# Altium PCB DE-020224.PcbDoc (part 1 of 3)
Units mil, origin at the board's own origin, x right, y up, seen from the top; angles counter-clockwise.
Board outline 7874.02 x 3937.01 mil, 2 copper layers (Top Layer, Bottom Layer); 364 components, 290 nets, 895 pads, 45 vias.
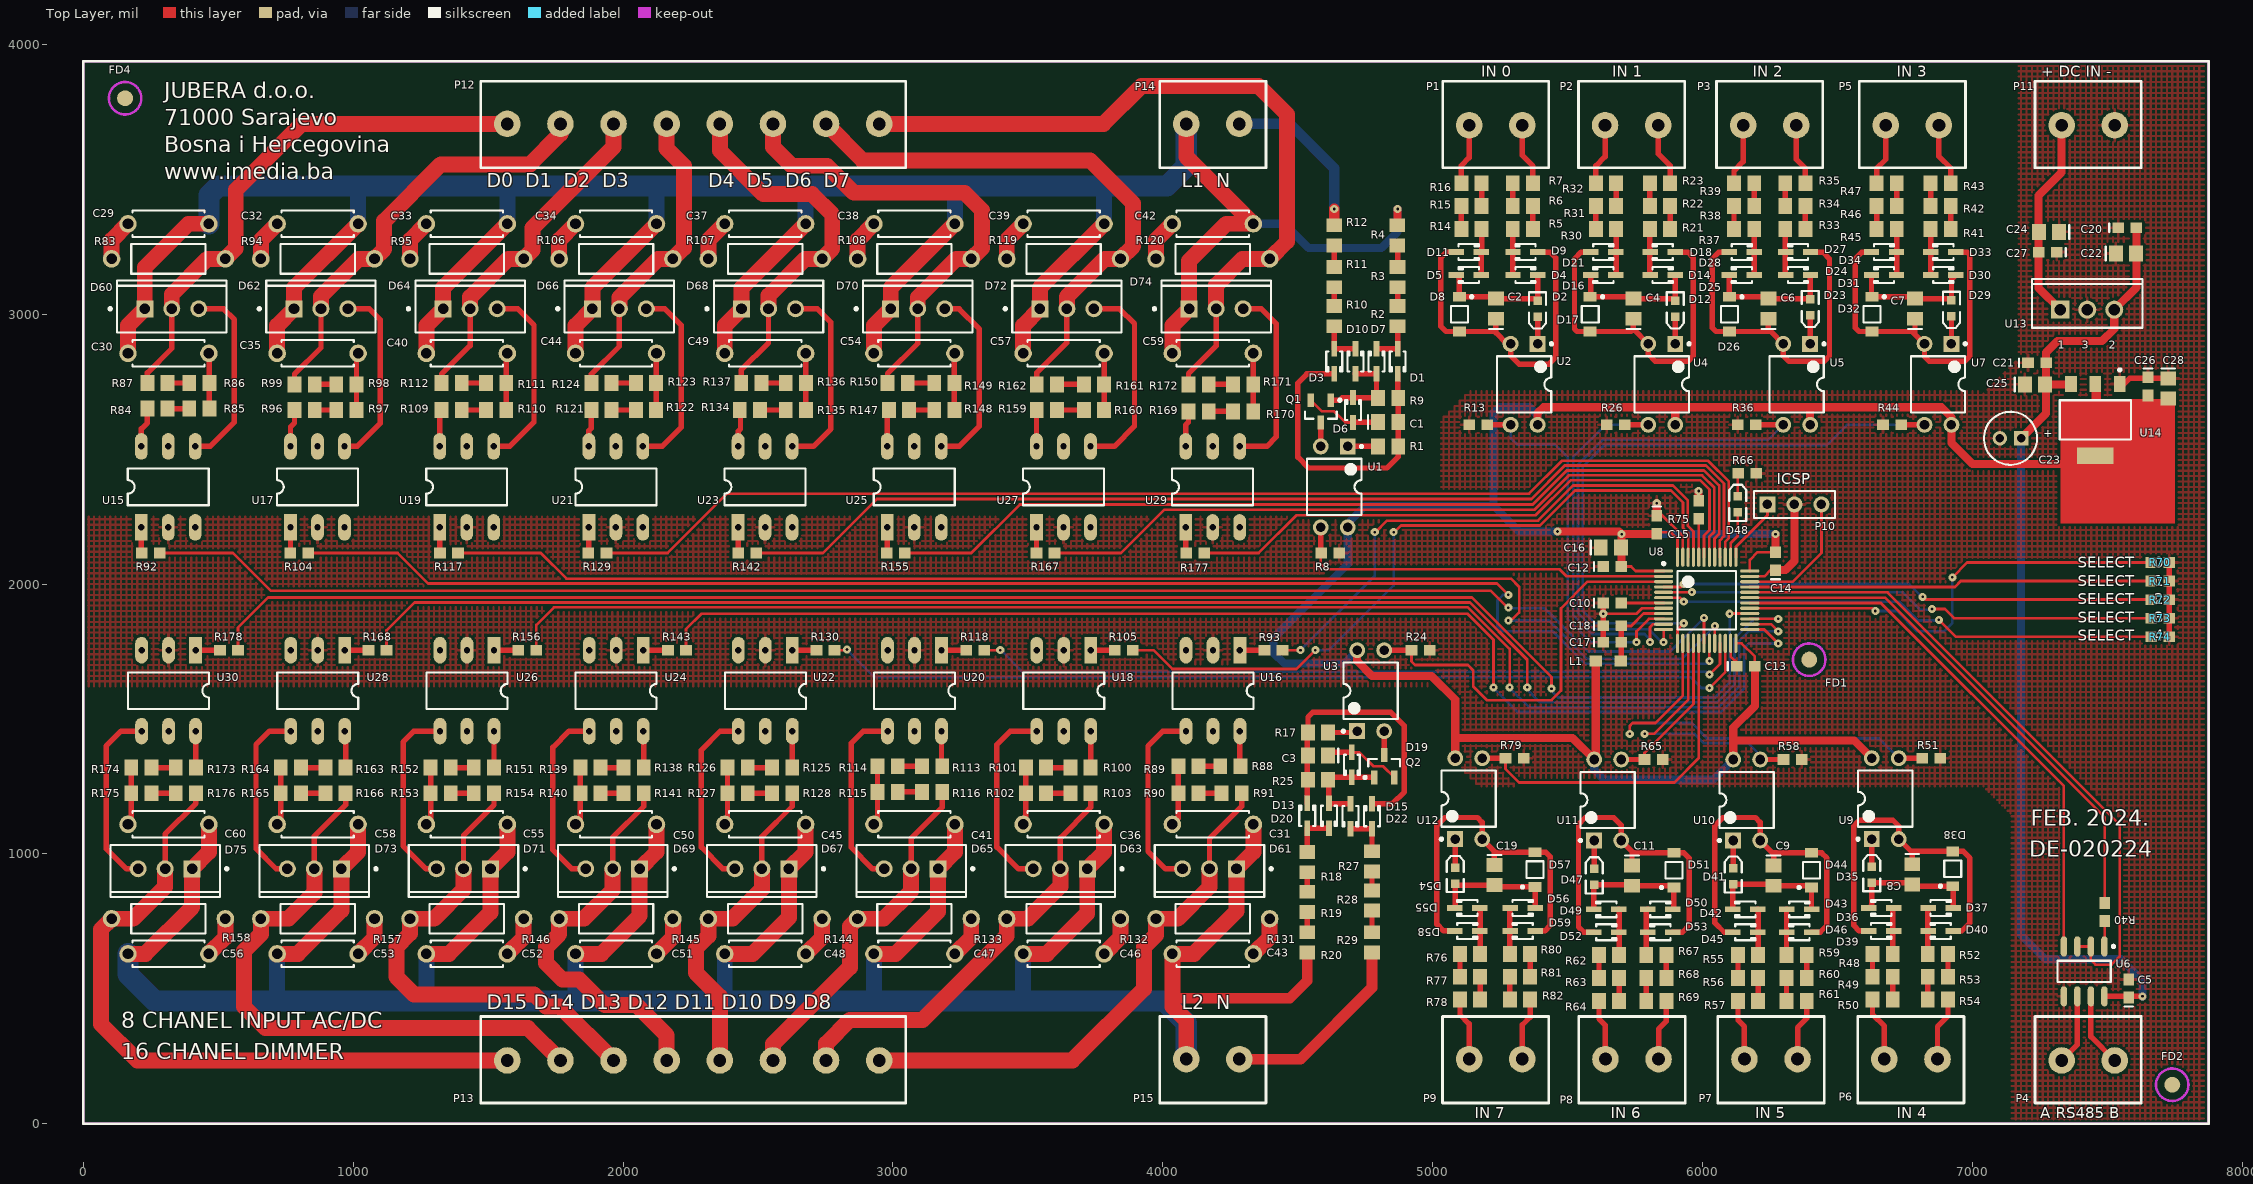
[diagram p0: Top Layer view]
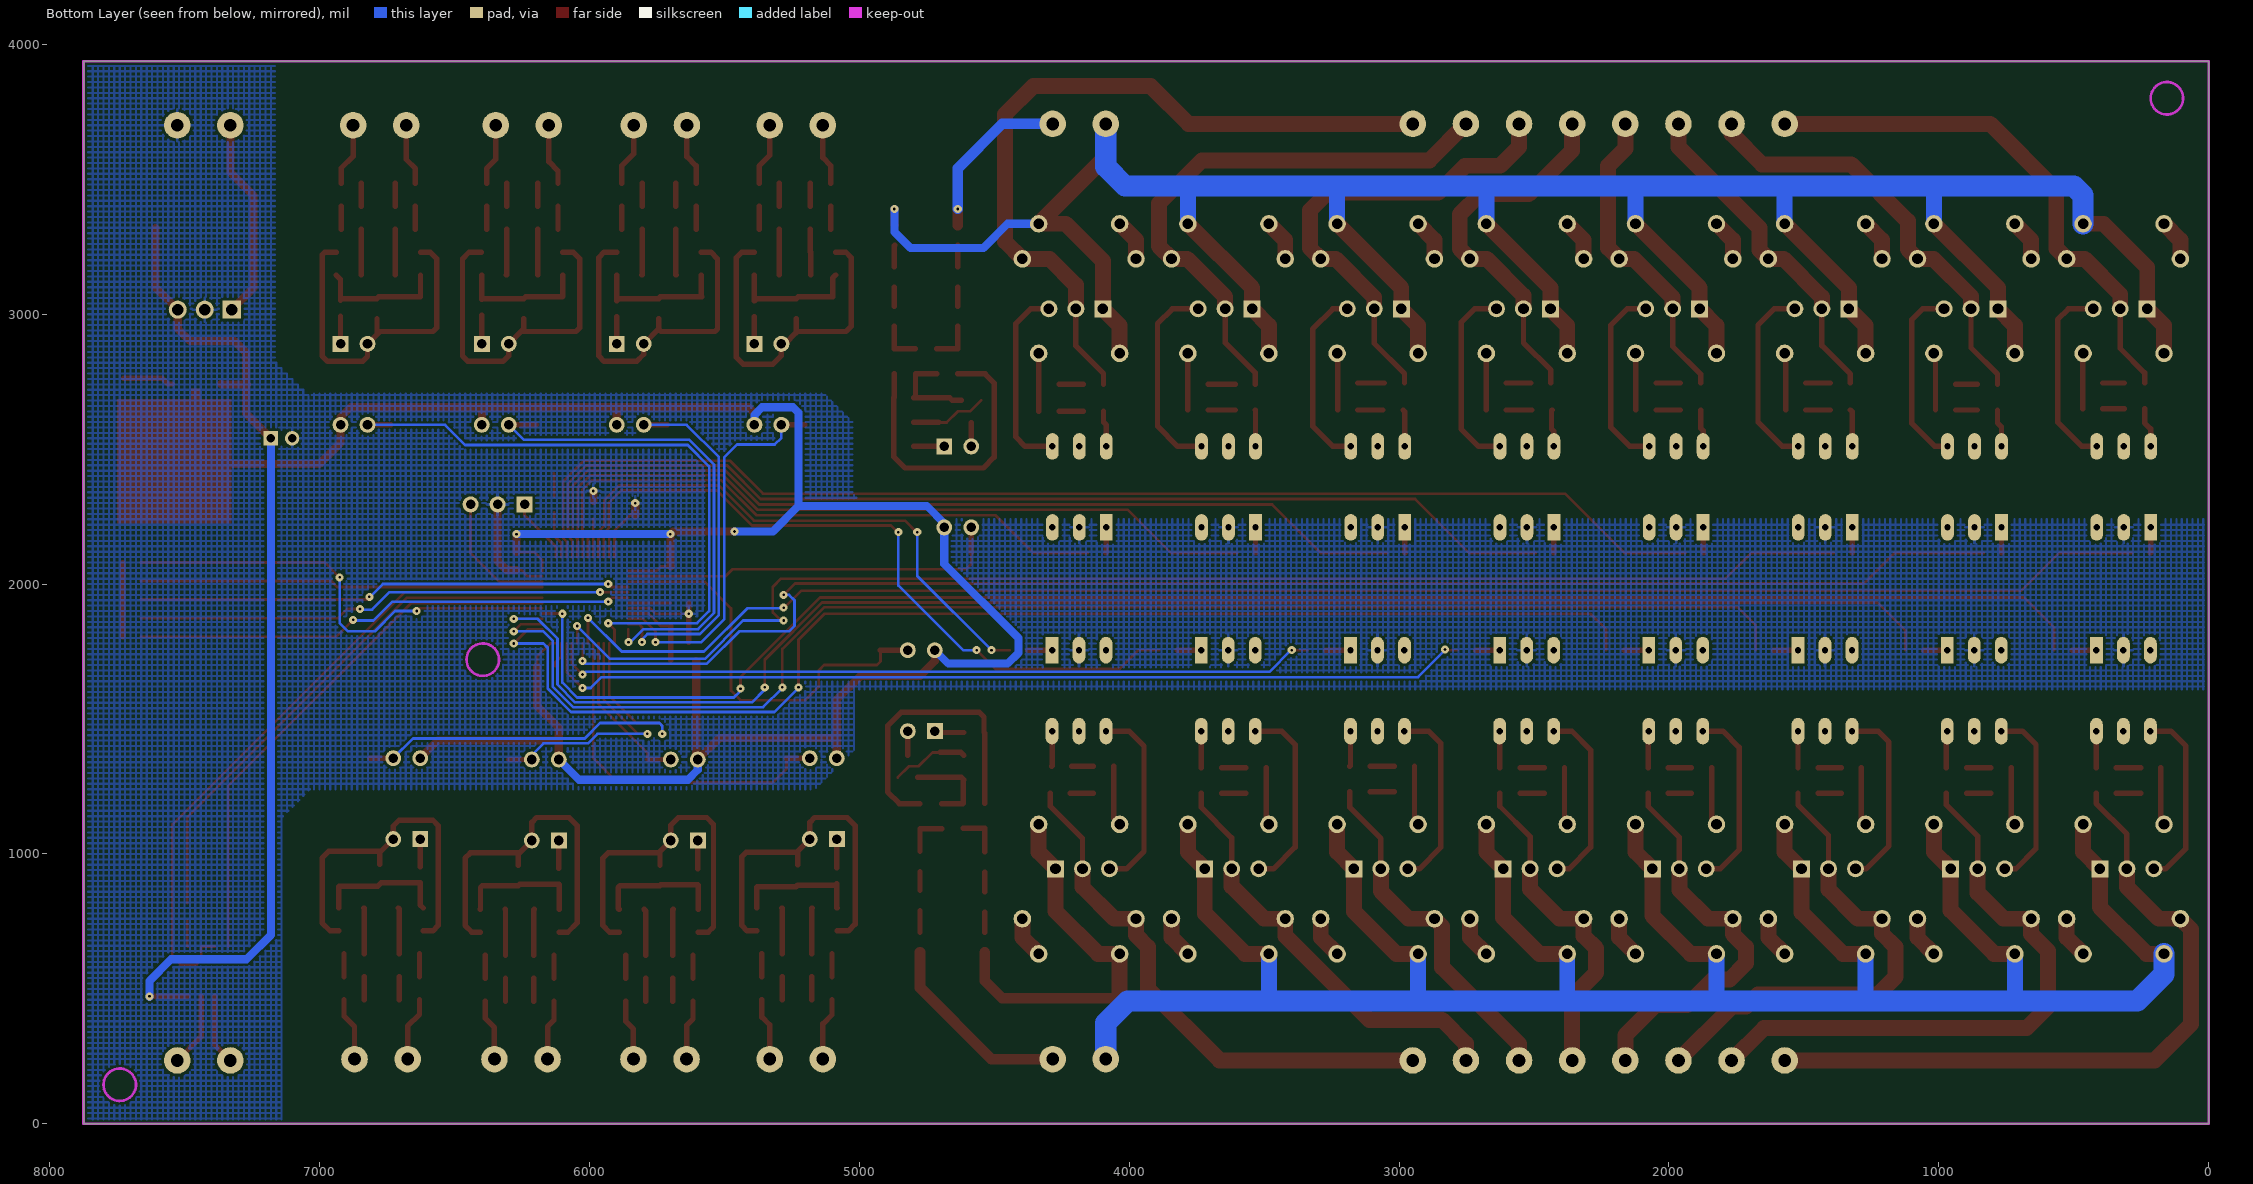
[diagram p1: Bottom Layer view, seen from below]

## Layer stack, top to bottom
Top Solder: solder mask 0.4, Solder Resist, Dk 3.5
Top Layer: signal copper 1.4
Dielectric 1: dielectric 12.6, FR-4, Dk 4.8
Bottom Layer: signal copper 1.4
Bottom Solder: solder mask 0.4, Solder Resist, Dk 3.5

## Board outline
0,0 0,3937.01 7874.02,3937.01 7874.02,0

## Design rules (kind name [scope] priority, off if disabled: settings)
Clearance [All] p1: gap=10 ignorepadtopadclearanceinfootprint=FALSE except(0: Arc-Hole Track-Hole SMDPad-Hole THPad-Hole Via-Hole Fill-Hole Poly-Hole Region-Hole Text-Hole; 5: SMDPad-SMDPad; 8: Arc-Arc Arc-Track Arc-SMDPad Arc-THPad Arc-Via Arc-Fill Arc-Poly Arc-Region Arc-Text Track-Track Track-SMDPad Track-THPad Track-Via Track-Fill Track-Poly Track-Region Track-Text)
MinimumSolderMaskSliver [All] p1 off: minsoldermaskwidth=10
PolygonConnect [All] p1: connectstyle=Relief reliefconductorwidth=10 reliefentries=4 polygonreliefangle="90 Angle" airgapwidth=10
RoutingVias [All] p1: holewidth=28 width=50 viastyle="Through Hole" minholewidth=10 minwidth=30 maxholewidth=28 maxwidth=50
SilkToSilkClearance [All] p1 off: silktosilkclearance=10
SilkToSolderMaskClearance [IsPad] p1 off: minsilkscreentomaskgap=10 clearancetoexposedcopper=TRUE
SolderMaskExpansion [All] p1: expansion=4
Width [All] p1: maxlimit=118.11 minlimit=10 preferedwidth=20
27 further rules are at their usual default settings.

## Classes and differential pairs
component class DE-020224_02: C29 C30 C31 C32 C33 C34 C35 C36 C37 C38 C39 C40 C41 C42 C43 C44 C45 C46 C47 C48 C49 C50 C51 C52 C53 C54 C55 C56 C57 C58 C59 C60 D60 D61 D62 D63 D64 D65 D66 D67 D68 D69 D70 D71 D72 D73 D74 D75 FD4 P12 P13 P14 P15 R83 R84 R85 R86 R87 R88 R89 R90 R91 R92 R93 R94 R95 R96 R97 R98 R99 R100 R101 R102 R103 R104 R105 R106 R107 R108 R109 R110 R111 R112 R113 R114 R115 R116 R117 R118 R119 R120 R121 R122 R123 R124 R125 R126 R127 R128 R129 R130 R131 R132 R133 R134 R135 R136 R137 R138 R139 R140 R141 R142 R143 R144 R145 R146 R147 R148 R149 R150 R151 R152 R153 R154 R155 R156 R157 R158 R159 R160 R161 R162 R163 R164 R165 R166 R167 R168 R169 R170 R171 R172 R173 R174 R175 R176 R177 R178 U15 U16 U17 U18 U19 U20 U21 U22 U23 U24 U25 U26 U27 U28 U29 U30
component class DE-020224_01: C1 C2 C3 C4 C5 C6 C7 C8 C9 C10 C11 C12 C13 C14 C15 C16 C17 C18 C19 C20 C21 C22 C23 C24 C25 C26 C27 C28 D1 D2 D3 D4 D5 D6 D7 D8 D9 D10 D11 D12 D13 D14 D15 D16 D17 D18 D19 D20 D21 D22 D23 D24 D25 D26 D27 D28 D29 D30 D31 D32 D33 D34 D35 D36 D37 D38 D39 D40 D41 D42 D43 D44 D45 D46 D47 D48 D49 D50 D51 D52 D53 D54 D55 D56 D57 D58 D59 FD1 FD2 L1 P1 P2 P3 P4 P5 P6 P7 P8 P9 P10 P11 Q1 Q2 R1 R2 R3 R4 R5 R6 R7 R8 R9 R10 R11 R12 R13 R14 R15 R16 R17 R18 R19 R20 R21 R22 R23 R24 R25 R26 R27 R28 R29 R30 R31 R32 R33 R34 R35 R36 R37 R38 R39 R40 R41 R42 R43 R44 R45 R46 R47 R48 R49 R50 R51 R52 R53 R54 R55 R56 R57 R58 R59 R60 R61 R62 R63 R64 R65 R66 R67 R68 R69 R70 R71 R72 R73 R74 R75 R76 R77 R78 R79 R80 R81 R82 U1 U2 U3 U4 U5 U6 U7 U8 U9 U10 U11 U12 U13 U14

## Components (designator, comment, footprint, x,y, rotation, side; value= is the part's Value field where it differs from the comment)
C1 "10uF" 0805 4835,2600 r0 top
C2 "10uF" 0805 5233.53,3020.21 r90 top
C3 "10uF" 0805 4575,1365 r180 top
C4 "10uF" 0805 5743.43,3020.21 r90 top
C5 "100nF" 0603 7578.43,501.54 r90 top
C6 "10uF" 0805 6243.43,3020.21 r90 top
C7 "10uF" 0805 6786.85,3020.21 r90 top
C8 "10uF" 0805 6776.57,924.79 r270 top
C9 "10uF" 0805 6263.15,919.79 r270 top
C10 "100nF" 0603 5665,1930 r0 top
C11 "10uF" 0805 5738.15,919.79 r270 top
C12 "100nF" 0603 5665,2065 r0 top
C13 "100nF" 0603 6160,1695 r0 top
C14 "100nF" 0603 6270,2085 r90 top
C15 "100nF" 0603 5830,2220 r270 top
C16 "4u7" 0805 5660,2135 r0 top value=10uF
C17 "1uF" 0603 5665,1785 r0 top
C18 "100nF" 0603 5665,1845 r0 top
C19 "10uF" 0805 5228.15,922.03 r270 top
C20 "100nF" 0603 7573.43,3320 r0 top
C21 "100nF" 0603 7239.19,2820 r0 top
C22 "10uF" 0805 7568.43,3225 r0 top
C23 "22uF" CAPPR2-5X11 7140.63,2540 r180 top value=47uF
C24 "10uF" 0805 7283.43,3305 r180 top
C25 "10uF" 0805 7231.31,2740 r0 top
C26 "100nF" 0603 7650,2732.44 r270 top
C27 "100nF" 0603 7278.43,3230 r180 top
C28 "10uF" 0805 7725,2724.57 r270 top
C29 "10nF/X2" VP52-2.5 315.53,3335 r0 top value=10nF
C30 "47nF/X2" VP52-2.5 315.53,2855 r0 top value=10nF
C31 "47nF/X2" VP52-2.5 4185,1110 r180 top value=10nF
C32 "10nF/X2" VP52-2.5 868.31,3335 r0 top value=10nF
C33 "10nF/X2" VP52-2.5 1421.09,3335 r0 top value=10nF
C34 "10nF/X2" VP52-2.5 1973.88,3335 r0 top value=10nF
C35 "47nF/X2" VP52-2.5 868.31,2855 r0 top value=10nF
C36 "47nF/X2" VP52-2.5 3632.22,1110 r180 top value=10nF
C37 "10nF/X2" VP52-2.5 2526.66,3335 r0 top value=10nF
C38 "10nF/X2" VP52-2.5 3079.44,3335 r0 top value=10nF
C39 "10nF/X2" VP52-2.5 3632.22,3335 r0 top value=10nF
C40 "47nF/X2" VP52-2.5 1421.09,2855 r0 top value=10nF
C41 "47nF/X2" VP52-2.5 3079.44,1110 r180 top value=10nF
C42 "10nF/X2" VP52-2.5 4185,3335 r0 top value=10nF
C43 "10nF/X2" VP52-2.5 4185,630 r180 top value=10nF
C44 "47nF/X2" VP52-2.5 1973.88,2855 r0 top value=10nF
C45 "47nF/X2" VP52-2.5 2526.66,1110 r180 top value=10nF
C46 "10nF/X2" VP52-2.5 3632.22,630 r180 top value=10nF
C47 "10nF/X2" VP52-2.5 3079.44,630 r180 top value=10nF
C48 "10nF/X2" VP52-2.5 2526.66,630 r180 top value=10nF
C49 "47nF/X2" VP52-2.5 2526.66,2855 r0 top value=10nF
C50 "47nF/X2" VP52-2.5 1973.88,1110 r180 top value=10nF
C51 "10nF/X2" VP52-2.5 1973.88,630 r180 top value=10nF
C52 "10nF/X2" VP52-2.5 1421.09,630 r180 top value=10nF
C53 "10nF/X2" VP52-2.5 868.31,630 r180 top value=10nF
C54 "47nF/X2" VP52-2.5 3079.44,2855 r0 top value=10nF
C55 "47nF/X2" VP52-2.5 1421.09,1110 r180 top value=10nF
C56 "10nF/X2" VP52-2.5 315.53,630 r180 top value=10nF
C57 "47nF/X2" VP52-2.5 3632.22,2855 r0 top value=10nF
C58 "47nF/X2" VP52-2.5 868.31,1110 r180 top value=10nF
C59 "47nF/X2" VP52-2.5 4185,2855 r0 top value=10nF
C60 "47nF/X2" VP52-2.5 315.53,1110 r180 top value=10nF
D1 "1N4148" SOD323 4870,2825 r270 top
D2 "LED_RED" 1.6X0.8X0.8 5388.43,3020 r270 top
D3 "1N4148" SOD323 4635,2825 r270 top
D4 "NF" SOD323 5343.43,3145 r0 top
D5 "NF" SOD323 5133.43,3145 r180 top
D6 "NF" SOD323 4705,2645 r90 top
D7 "1N4148" SOD323 4791.67,2825 r90 top
D8 "5V1" ONSC-SOD-123-2-425-04_V 5098.43,3000 r270 top
D9 "NF" SOD323 5343.43,3229.98 r180 top
D10 "1N4148" SOD323 4713.33,2825 r90 top
D11 "NF" SOD323 5133.43,3229.98 r0 top
D12 "LED_RED" 1.6X0.8X0.8 5898.43,3020 r270 top
D13 "1N4148" SOD323 4535,1141.26 r90 top
D14 "NF" SOD323 5851.85,3145 r0 top
D15 "1N4148" SOD323 4775,1140 r90 top
D16 "NF" SOD323 5631.85,3145 r180 top
D17 "5V1" ONSC-SOD-123-2-425-04_V 5583.43,3000 r270 top
D18 "NF" SOD323 5851.85,3229.98 r180 top
D19 "NF" SOD323 4700,1330 r270 top
D20 "1N4148" SOD323 4615,1141.26 r270 top
D21 "NF" SOD323 5631.85,3230 r0 top
D22 "1N4148" SOD323 4695,1140 r270 top
D23 "LED_RED" 1.6X0.8X0.8 6398.43,3025 r270 top
D24 "NF" SOD323 6353.43,3145 r0 top
D25 "NF" SOD323 6145,3145 r180 top
D26 "5V1" ONSC-SOD-123-2-425-04_V 6100,3000 r270 top
D27 "NF" SOD323 6353.43,3230 r180 top
D28 "NF" SOD323 6145,3230 r0 top
D29 "LED_RED" 1.6X0.8X0.8 6921.85,3022.24 r270 top
D30 "NF" SOD323 6891.85,3145 r0 top
D31 "NF" SOD323 6671.85,3145 r180 top
D32 "5V1" ONSC-SOD-123-2-425-04_V 6626.85,3000 r270 top
D33 "NF" SOD323 6891.85,3230 r180 top
D34 "NF" SOD323 6671.85,3230 r0 top
D35 "LED_RED" 1.6X0.8X0.8 6626.57,922.76 r90 top
D36 "NF" SOD323 6661.57,800 r180 top
D37 "NF" SOD323 6881.57,800 r0 top
D38 "5V1" ONSC-SOD-123-2-425-04_V 6926.57,945 r90 top
D39 "NF" SOD323 6661.57,715 r0 top
D40 "NF" SOD323 6881.57,715 r180 top
D41 "LED_RED" 1.6X0.8X0.8 6113.15,917.76 r90 top
D42 "NF" SOD323 6158.15,795 r180 top
D43 "NF" SOD323 6358.15,795 r0 top
D44 "5V1" ONSC-SOD-123-2-425-04_V 6403.15,940 r90 top
D45 "NF" SOD323 6158.15,710 r0 top
D46 "NF" SOD323 6358.15,710 r180 top
D47 "LED_RED" 1.6X0.8X0.8 5598.15,915 r90 top
D48 "LED_RED" 1.6X0.8X0.8 6130,2295 r90 top
D49 "NF" SOD323 5643.15,795 r180 top
D50 "NF" SOD323 5843.15,795 r0 top
D51 "5V1" ONSC-SOD-123-2-425-04_V 5893.15,940 r90 top
D52 "NF" SOD323 5643.15,710 r0 top
D53 "NF" SOD323 5843.15,710 r180 top
D54 "LED_RED" 1.6X0.8X0.8 5083.15,920 r90 top
D55 "NF" SOD323 5128.15,800 r180 top
D56 "NF" SOD323 5333.15,800 r0 top
D57 "5V1" ONSC-SOD-123-2-425-04_V 5378.15,942.24 r90 top
D58 "NF" SOD323 5128.15,715 r0 top
D59 "NF" SOD323 5333.15,715 r180 top
D60 "BTA16-600" ONSC-TO-220-3-221A-07 327.83,3020 r90 top
D61 "BTA16-600" ONSC-TO-220-3-221A-07 4172.7,945 r270 top
D62 "BTA16-600" ONSC-TO-220-3-221A-07 880.62,3020 r90 top
D63 "BTA16-600" ONSC-TO-220-3-221A-07 3619.92,945 r270 top
D64 "BTA16-600" ONSC-TO-220-3-221A-07 1433.4,3020 r90 top
D65 "BTA16-600" ONSC-TO-220-3-221A-07 3067.13,945 r270 top
D66 "BTA16-600" ONSC-TO-220-3-221A-07 1986.18,3020 r90 top
D67 "BTA16-600" ONSC-TO-220-3-221A-07 2514.35,945 r270 top
D68 "BTA16-600" ONSC-TO-220-3-221A-07 2538.96,3020 r90 top
D69 "BTA16-600" ONSC-TO-220-3-221A-07 1961.57,945 r270 top
D70 "BTA16-600" ONSC-TO-220-3-221A-07 3091.74,3020 r90 top
D71 "BTA16-600" ONSC-TO-220-3-221A-07 1408.79,945 r270 top
D72 "BTA16-600" ONSC-TO-220-3-221A-07 3644.52,3020 r90 top
D73 "BTA16-600" ONSC-TO-220-3-221A-07 856.01,945 r270 top
D74 "BTA16-600" ONSC-TO-220-3-221A-07 4197.3,3020 r90 top
D75 "BTA16-600" ONSC-TO-220-3-221A-07 303.23,945 r270 top
FD1 "Fiducial" Fiducial 6395,1720 r0 top
FD2 "Fiducial" Fiducial 7740,145 r0 top
FD4 "Fiducial" Fiducial 155,3800 r0 top
L1 "120R" SMD-0805 5650,1715 r0 top
P1 "TERMINAL BLOK 2" "TERMINAL BLOK 2" 5233.43,3700 r90 top
P2 "TERMINAL BLOK 2" "TERMINAL BLOK 2" 5736.85,3700 r90 top
P3 "TERMINAL BLOK 2" "TERMINAL BLOK 2" 6248.43,3700 r90 top
P4 "TERMINAL BLOK 2" "TERMINAL BLOK 2" 7428.43,235 r90 top
P5 "TERMINAL BLOK 2" "TERMINAL BLOK 2" 6776.85,3700 r90 top
P6 "TERMINAL BLOK 2" "TERMINAL BLOK 2" 6771.57,240 r270 top
P7 "TERMINAL BLOK 2" "TERMINAL BLOK 2" 6253.15,240 r270 top
P8 "TERMINAL BLOK 2" "TERMINAL BLOK 2" 5738.15,240 r270 top
P9 "TERMINAL BLOK 2" "TERMINAL BLOK 2" 5233.15,240 r270 top
P10 "Header 3" HDR1X3 6240,2295 r0 top
P11 "TERMINAL BLOK 2" "TERMINAL BLOK 2" 7428.43,3700 r90 top
P12 "DIMMER 0 ~ 7" "TERMINAL BLOK 8" 2260,3705 r270 top
P13 "DIMMER 8 ~ 15" "TERMINAL BLOK 8" 2260,235 r90 top
P14 "TERMINAL BLOK 2" "TERMINAL BLOK 2" 4185,3705 r270 top
P15 "TERMINAL BLOK 2" "TERMINAL BLOK 2" 4185,240 r270 top
Q1 "MMBT2222" SOT23_N 4585,2640 r270 top
Q2 "MMBT2222" SOT23_N 4820,1325 r90 top
R1 "1K" ERA-0805 4835,2510 r0 top
R2 "56K" ERA-0805 4870,2992.4 r270 top
R3 "56K" ERA-0805 4870,3137.4 r270 top
R4 "56K" ERA-0805 4868.46,3292.4 r270 top
R5 "47K" ERA-0805 5333.43,3315.03 r180 top
R6 "47K" ERA-0805 5333.43,3400.02 r0 top
R7 "47K" ERA-0805 5333.43,3485 r180 top
R8 "10K" ERA-0603 4620,2115 r0 top
R9 "10K" ERA-0805 4835,2690 r180 top
R10 "56K" ERA-0805 4635,2992.4 r270 top
R11 "56K" ERA-0805 4635,3137.4 r270 top
R12 "56K" ERA-0805 4635,3292.4 r270 top
R13 "10K" ERA-0603 5168.43,2590 r180 top
R14 "47K" ERA-0805 5143.43,3315.03 r0 top
R15 "47K" ERA-0805 5143.43,3400.02 r180 top
R16 "47K" ERA-0805 5143.43,3485 r0 top
R17 "1K" ERA-0805 4575,1450 r180 top
R18 "56K" ERA-0805 4535,970 r90 top
R19 "56K" ERA-0805 4535,822.4 r90 top
R20 "56K" ERA-0805 4535,672.4 r90 top
R21 "47K" ERA-0805 5841.85,3315.03 r180 top
R22 "47K" ERA-0805 5841.85,3400.02 r0 top
R23 "47K" ERA-0805 5841.85,3485 r180 top
R24 "10K" ERA-0603 4955,1755 r0 top
R25 "10K" ERA-0805 4575,1275 r0 top
R26 "10K" ERA-0603 5678.43,2590 r180 top
R27 "56K" ERA-0805 4775,972.6 r90 top
R28 "56K" ERA-0805 4775,827.6 r90 top
R29 "56K" ERA-0805 4775,672.6 r90 top
R30 "47K" ERA-0805 5641.85,3315 r0 top
R31 "47K" ERA-0805 5641.85,3400 r180 top
R32 "47K" ERA-0805 5641.85,3485 r0 top
R33 "47K" ERA-0805 6343.43,3315.03 r180 top
R34 "47K" ERA-0805 6343.43,3400.02 r0 top
R35 "47K" ERA-0805 6343.43,3485 r180 top
R36 "10K" ERA-0603 6163.43,2590 r180 top
R37 "47K" ERA-0805 6153.43,3315.03 r0 top
R38 "47K" ERA-0805 6153.43,3400.02 r180 top
R39 "47K" ERA-0805 6153.43,3485 r0 top
R40 "1K" ERA-0603 7490,785 r90 top
R41 "47K" ERA-0805 6881.85,3315.03 r180 top
R42 "47K" ERA-0805 6881.85,3400.02 r0 top
R43 "47K" ERA-0805 6881.85,3485 r180 top
R44 "10K" ERA-0603 6701.85,2590 r180 top
R45 "47K" ERA-0805 6681.85,3315.03 r0 top
R46 "47K" ERA-0805 6681.85,3400.02 r180 top
R47 "47K" ERA-0805 6681.85,3485 r0 top
R48 "47K" ERA-0805 6666.57,629.97 r0 top
R49 "47K" ERA-0805 6666.57,544.98 r180 top
R50 "47K" ERA-0805 6666.57,460 r0 top
R51 "10K" ERA-0603 6846.57,1355 r0 top
R52 "47K" ERA-0805 6871.57,629.97 r180 top
R53 "47K" ERA-0805 6871.57,544.98 r0 top
R54 "47K" ERA-0805 6871.57,460 r180 top
R55 "47K" ERA-0805 6168.15,624.97 r0 top
R56 "47K" ERA-0805 6168.15,539.98 r180 top
R57 "47K" ERA-0805 6168.15,455 r0 top
R58 "10K" ERA-0603 6333.15,1350 r0 top
R59 "47K" ERA-0805 6348.15,624.97 r180 top
R60 "47K" ERA-0805 6348.15,539.98 r0 top
R61 "47K" ERA-0805 6348.15,455 r180 top
R62 "47K" ERA-0805 5653.15,624.97 r0 top
R63 "47K" ERA-0805 5653.15,539.98 r180 top
R64 "47K" ERA-0805 5653.15,455 r0 top
R65 "10K" ERA-0603 5818.15,1350 r0 top
R66 "4K7" ERA-0603 6165,2410 r0 top
R67 "47K" ERA-0805 5828.15,624.97 r180 top
R68 "47K" ERA-0805 5828.15,539.98 r0 top
R69 "47K" ERA-0805 5828.15,455 r180 top
R70 "NF" ERA-0603 7695,2080 r0 top
R71 "NF" ERA-0603 7695,2011.25 r0 top
R72 "NF" ERA-0603 7695,1942.5 r0 top
R73 "NF" ERA-0603 7695,1873.75 r0 top
R74 "NF" ERA-0603 7695,1805 r0 top
R75 "10K" ERA-0603 5985,2275 r90 top
R76 "47K" ERA-0805 5138.15,630 r0 top
R77 "47K" ERA-0805 5138.15,545 r180 top
R78 "47K" ERA-0805 5138.15,460 r0 top
R79 "10K" ERA-0603 5303.15,1355 r0 top
R80 "47K" ERA-0805 5323.15,630 r180 top
R81 "47K" ERA-0805 5323.15,545 r0 top
R82 "47K" ERA-0805 5323.15,460 r180 top
R83 "100R" R6.35x2.3 315.53,3205 r180 top
R84 "220R" ERA-0805 275,2650 r0 top
R85 "220R" ERA-0805 430,2650 r0 top
R86 "220R" ERA-0805 430,2745 r180 top
R87 "220R" ERA-0805 275,2745 r180 top
R88 "220R" ERA-0805 4250,1325 r180 top
R89 "220R" ERA-0805 4095,1325 r180 top
R90 "220R" ERA-0805 4095,1225 r0 top
R91 "220R" ERA-0805 4255,1225 r0 top
R92 "330R" ERA-0603 250,2115 r180 top
R93 "330R" ERA-0603 4410,1755 r180 top
R94 "100R" R6.35x2.3 868.31,3205 r180 top
R95 "100R" R6.35x2.3 1421.09,3205 r180 top
R96 "220R" ERA-0805 820,2645 r0 top
R97 "220R" ERA-0805 975,2645 r0 top
R98 "220R" ERA-0805 975,2740 r180 top
R99 "220R" ERA-0805 820,2740 r180 top
R100 "220R" ERA-0805 3695,1320 r180 top
R101 "220R" ERA-0805 3530,1320 r180 top
R102 "220R" ERA-0805 3530,1225 r0 top
R103 "220R" ERA-0805 3695,1225 r0 top
R104 "330R" ERA-0603 800,2115 r180 top
R105 "330R" ERA-0603 3855,1755 r180 top
R106 "100R" R6.35x2.3 1973.88,3205 r180 top
R107 "100R" R6.35x2.3 2526.66,3205 r180 top
R108 "100R" R6.35x2.3 3079.44,3205 r180 top
R109 "220R" ERA-0805 1365,2645 r0 top
R110 "220R" ERA-0805 1530,2645 r0 top
R111 "220R" ERA-0805 1530,2745 r180 top
R112 "220R" ERA-0805 1365,2745 r180 top
R113 "220R" ERA-0805 3145,1325 r180 top
R114 "220R" ERA-0805 2980,1325 r180 top
R115 "220R" ERA-0805 2980,1230 r0 top
R116 "220R" ERA-0805 3145,1230 r0 top
R117 "330R" ERA-0603 1355,2115 r180 top
R118 "330R" ERA-0603 3305,1755 r180 top
R119 "100R" R6.35x2.3 3632.22,3205 r180 top
R120 "100R" R6.35x2.3 4185,3205 r180 top
R121 "220R" ERA-0805 1920,2645 r0 top
R122 "220R" ERA-0805 2085,2645 r0 top
R123 "220R" ERA-0805 2085,2745 r180 top
R124 "220R" ERA-0805 1920,2745 r180 top
R125 "220R" ERA-0805 2589.37,1320 r180 top
R126 "220R" ERA-0805 2424.37,1320 r180 top
R127 "220R" ERA-0805 2424.37,1225 r0 top
R128 "220R" ERA-0805 2589.37,1225 r0 top
R129 "330R" ERA-0603 1905,2115 r180 top
R130 "330R" ERA-0603 2750,1755 r180 top
R131 "100R" R6.35x2.3 4185,760 r0 top
R132 "100R" R6.35x2.3 3632.22,760 r0 top
R133 "100R" R6.35x2.3 3079.44,760 r0 top
R134 "220R" ERA-0805 2470,2645 r0 top
R135 "220R" ERA-0805 2640,2645 r0 top
R136 "220R" ERA-0805 2640,2745 r180 top
R137 "220R" ERA-0805 2475,2745 r180 top
R138 "220R" ERA-0805 2039.37,1320 r180 top
R139 "220R" ERA-0805 1879.37,1320 r180 top
R140 "220R" ERA-0805 1879.37,1225 r0 top
R141 "220R" ERA-0805 2039.37,1225 r0 top
R142 "330R" ERA-0603 2460,2115 r180 top
R143 "330R" ERA-0603 2200,1755 r180 top
R144 "100R" R6.35x2.3 2526.66,760 r0 top
R145 "100R" R6.35x2.3 1973.88,760 r0 top
R146 "100R" R6.35x2.3 1421.09,760 r0 top
R147 "220R" ERA-0805 3022.3,2645 r0 top
R148 "220R" ERA-0805 3190,2645 r0 top
R149 "220R" ERA-0805 3190,2745 r180 top
R150 "220R" ERA-0805 3017.3,2745 r180 top
R151 "220R" ERA-0805 1484.37,1320 r180 top
R152 "220R" ERA-0805 1324.37,1320 r180 top
R153 "220R" ERA-0805 1324.37,1225 r0 top
R154 "220R" ERA-0805 1484.37,1225 r0 top
R155 "330R" ERA-0603 3010,2115 r180 top
R156 "330R" ERA-0603 1645,1755 r180 top
R157 "100R" R6.35x2.3 868.31,760 r0 top
R158 "100R" R6.35x2.3 315.53,760 r0 top
R159 "220R" ERA-0805 3570,2645 r0 top
R160 "220R" ERA-0805 3745,2645 r0 top
R161 "220R" ERA-0805 3745,2740 r180 top
R162 "220R" ERA-0805 3570,2740 r180 top
R163 "220R" ERA-0805 934.37,1320 r180 top
R164 "220R" ERA-0805 769.37,1320 r180 top
R165 "220R" ERA-0805 769.37,1225 r0 top
R166 "220R" ERA-0805 934.37,1225 r0 top
R167 "330R" ERA-0603 3565,2115 r180 top
R168 "330R" ERA-0603 1090,1755 r180 top
R169 "220R" ERA-0805 4132.3,2640 r0 top
R170 "220R" ERA-0805 4297.3,2640 r0 top
R171 "220R" ERA-0805 4297.3,2740 r180 top
R172 "220R" ERA-0805 4132.3,2740 r180 top
R173 "220R" ERA-0805 380,1320 r180 top
R174 "220R" ERA-0805 215,1320 r180 top
R175 "220R" ERA-0805 215,1225 r0 top
R176 "220R" ERA-0805 380,1225 r0 top
R177 "330R" ERA-0603 4120,2115 r180 top
R178 "330R" ERA-0603 540,1755 r180 top
U1 "PC817" DIP-4 4635,2360 r270 top
U2 "PC817" DIP-4 5338.43,2740 r270 top
U3 "PC817" DIP-4 4770,1605 r90 top
U4 "PC817" DIP-4 5848.43,2740 r270 top
U5 "PC817" DIP-4 6348.43,2740 r270 top
U6 "SN75176BD" D008_L 7413.43,565 r270 top
U7 "PC817" DIP-4 6871.85,2740 r270 top
U8 "STM32F103C8T6" STM-LQFP48_N 6015,1940 r0 top
U9 "PC817" DIP-4 6676.57,1205 r90 top
U10 "PC817" DIP-4 6163.15,1200 r90 top
U11 "PC817" DIP-4 5648.15,1200 r90 top
U12 "PC817" DIP-4 5133.15,1205 r90 top
U13 "L7805CV" TO220ABN 7425,3016.65 r0 top
U14 "REG1117-3.3" ZZ311 7455,2608.43 r180 top
U15 "MOC3051" DIP6 215,2210 r90 top
U16 "MOC3051" DIP6 4285.53,1755 r270 top
U17 "MOC3051" DIP6 767.78,2210 r90 top
U18 "MOC3051" DIP6 3732.75,1755 r270 top
U19 "MOC3051" DIP6 1320.56,2210 r90 top
U20 "MOC3051" DIP6 3179.97,1755 r270 top
U21 "MOC3051" DIP6 1873.34,2210 r90 top
U22 "MOC3051" DIP6 2627.19,1755 r270 top
U23 "MOC3051" DIP6 2426.12,2210 r90 top
U24 "MOC3051" DIP6 2074.41,1755 r270 top
U25 "MOC3051" DIP6 2978.91,2210 r90 top
U26 "MOC3051" DIP6 1521.63,1755 r270 top
U27 "MOC3051" DIP6 3531.69,2210 r90 top
U28 "MOC3051" DIP6 968.84,1755 r270 top
U29 "MOC3051" DIP6 4084.47,2210 r90 top
U30 "MOC3051" DIP6 416.06,1755 r270 top

## Footprints (in the part's own frame and the unit in brackets; to place one, negate y for a bottom-side part, rotate by r counter-clockwise, add the part's x,y. Pads: shape width x height; smd on the part's side, far side on the other; paste and mask are expansions set on the pad)
1.6X0.8X0.8 [mm] "SM LED; 2 Flat Leads"
  rect 0.8x0.8 smd: 1(-0.75,0) 2(0.75,0)
  silkscreen extent -1.55,-0.8 1.85,0.8
0603 [mm] "Chip Capacitor; Body 1.6 x 0.8 mm (LxW typ)"
  rect 1.1x1 smd: 1(-0.85,0) 2(0.85,0)
  silkscreen extent -1.7,-0.4 -1.7,0.4
0805 [mm] "Chip Capacitor; Body 2.0 x 1.2 mm (LxW typ)"
  rect 1.3x1.5 smd: 1(-0.95,0) 2(0.95,0)
  silkscreen extent -1.9,-0.65 -1.9,0.65
CAPPR2-5X11 [mm] "Capacitor, Electrolytic, Radial; Body 5 x 11 mm (Dia.xH typ); Pin Spacing 2 mm (typ)"
  rect 1.35x1.35 hole 0.8: 1(-1,0)
  round 1.35 hole 0.8: 2(1,0)
  silkscreen extent -2.5,-2.5 2.5,2.5
D008_L [mm] "SOIC, 8-Leads, Body 4.9x3.9mm, Pitch 1.27mm, IPC High Density"
  oval 1.9x0.6 smd: 1(-2.35,1.905) 2(-2.35,0.635) 3(-2.35,-0.635) 4(-2.35,-1.905) 5(2.35,-1.905) 6(2.35,-0.635) 7(2.35,0.635) 8(2.35,1.905)
  silkscreen extent -2.47,-2.5 1,2.88, body extent -2,-2.5 2,2.5, height 1.75
DIP6 [mm]
  rect 2.5x1.2 hole 0.6: 1(0,0)
  oval 2.5x1.2 hole 0.6: 2(0,-2.54) 3(0,-5.08) 4(7.62,-5.08) 5(7.62,-2.54) 6(7.62,0)
  silkscreen extent 2.08,-6.35 5.54,1.27, body extent 0.63,-6.48 6.98,1.27, height 1
DIP-4 [mm] "DIP; 4 Leads; Row Spacing 7.62 mm; Pitch 2.54 mm"
  rect 1.5x1.5 hole 0.9: 1(-3.81,1.27)
  round 1.5 hole 0.9: 2(-3.81,-1.27) 3(3.81,-1.27) 4(3.81,1.27)
  silkscreen extent -3.93,-2.55 2.65,2.7, body extent -3.15,-2.5 3.15,2.5, height 5.6
ERA-0603 [mm] "Chip Resistor; Body 1.6 x 0.8 mm (LxW typ)"
  rect 1.1x1 smd: 1(-0.85,0) 2(0.85,0)
ERA-0805 [mm] "Chip Resistor; Body 2 x 1.3 mm (LxW typ)"
  rect 1.3x1.5 smd: 1(-0.95,0) 2(0.95,0)
Fiducial [mm] "Pick and place machine mark"
  round 1.5 smd paste+0 mask+0.8: 3(0,0)
  Keep-Out Layer circle w0.254: c0,0 r1.529
HDR1X3 [mm] "Connector; Header; 3 Position"
  rect 1.5x1.5 hole 0.9: 1(0,0)
  round 1.5 hole 0.9: 2(2.54,0) 3(5.08,0)
  silkscreen extent -1.27,-1.27 6.35,1.27
ONSC-SOD-123-2-425-04_V [mm] "SOD, 2-Leads, Body 2.69x1.6mm"
  rect 0.91x1.22 smd: 1(-1.635,0) 2(1.635,0)
  silkscreen extent -1.76,-0.8 0.78,1.29, body extent -1.35,-0.8 1.35,0.8, height 1.35
ONSC-TO-220-3-221A-07 [mm] "FM, 3-Leads, Body 10.3x4.85mm, Pitch 2.54mm"
  rect 1.6x1.6 hole 1: 1(0,2.54)
  round 1.6 hole 1: 2(0,0) 3(0,-2.54)
  silkscreen extent -2.23,-5.15 2.67,5.92, body extent -2.21,-5.15 2.64,5.15, height 19.68
R6.35x2.3 [mm] "Resistor, Axial; Body 7 x 2.8 mm (LxDia. max), Lead Dia. 0.7 mm (max)"
  round 1.65 hole 1: 1(-5.35,0) 2(5.35,0)
  silkscreen extent -3.5,-1.4 3.5,1.4
SMD-0805 [mm] "Chip Inductor, 2-Leads, Body 2.0x1.2mm"
  rect 1.15x1 smd: 1(-1.175,0) 2(1.175,0)
  body extent -1,-0.6 1,0.6, height 1.1
SOD323 [mm] "SOD-323/SC-76; 2 Leads; Body 1.7 x 1.3 mm, (LxW)"
  rect 1.45x0.55 smd: 1(1.175,0) 2(-1.175,0)
  silkscreen extent -0.95,-0.75 0.95,0.75
SOT23_N [mm] "SOT23, 3-Leads, Body 2.9x1.3mm, Pitch 0.95mm, Lead Span 2.3mm, IPC Medium Density"
  rect 1.3x0.6 smd: 1(-1.05,0.95) 2(-1.05,-0.95) 3(1.05,0)
  silkscreen extent -1.17,-1.5 0.7,1.93, body extent -0.7,-1.5 0.7,1.5, height 1.1
STM-LQFP48_N [mm] "QFP, 48-Leads, Body 7x7mm, Pitch 0.5mm, IPC Medium Density"
  oval 1.8x0.3 smd: 1(-4.05,2.75) 2(-4.05,2.25) 3(-4.05,1.75) 4(-4.05,1.25) 5(-4.05,0.75) 6(-4.05,0.25) 7(-4.05,-0.25) 8(-4.05,-0.75) 9(-4.05,-1.25) 10(-4.05,-1.75) 11(-4.05,-2.25) 12(-4.05,-2.75) 25(4.05,-2.75) 26(4.05,-2.25) 27(4.05,-1.75) 28(4.05,-1.25) 29(4.05,-0.75) 30(4.05,-0.25) 31(4.05,0.25) 32(4.05,0.75) 33(4.05,1.25) 34(4.05,1.75) 35(4.05,2.25) 36(4.05,2.75)
  oval 0.3x1.8 smd: 13(-2.75,-4.05) 14(-2.25,-4.05) 15(-1.75,-4.05) 16(-1.25,-4.05) 17(-0.75,-4.05) 18(-0.25,-4.05) 19(0.25,-4.05) 20(0.75,-4.05) 21(1.25,-4.05) 22(1.75,-4.05) 23(2.25,-4.05) 24(2.75,-4.05) 37(2.75,4.05) 38(2.25,4.05) 39(1.75,4.05) 40(1.25,4.05) 41(0.75,4.05) 42(0.25,4.05) 43(-0.25,4.05) 44(-0.75,4.05) 45(-1.25,4.05) 46(-1.75,4.05) 47(-2.25,4.05) 48(-2.75,4.05)
  silkscreen extent -4.17,-2.75 2.75,3.57, body extent -3.5,-3.5 3.5,3.5, height 1.6
"TERMINAL BLOK 2" [mm] "2 pinski terminal blok konektor"
  round 2.5 hole 1.2: 1(0,-2.5) 2(0,2.5)
  silkscreen extent -4,-5 4.13,5
"TERMINAL BLOK 8" [mm] "8 pinski terminal blok konektor"
  round 2.5 hole 1.2: 1(0,-17.5) 2(0,-12.5) 3(0,-7.5) 4(0,-2.5) 5(0,2.5) 6(0,7.5) 7(0,12.5) 8(0,17.5)
  silkscreen extent -4,-20 4.13,20
TO220ABN [mm] "TO, Thru-Hole, Vertical, Heatsink Mounted; 3 In-Line Leads; Pitch 2.54 mm; Pin sequence 1, 3, 2"
  rect 1.7x1.7 hole 1.1: 1(-2.54,0)
  round 1.7 hole 1.1: 2(2.54,0) 3(0,0)
  silkscreen extent -5.2,-1.7 5.2,2.9
VP52-2.5 [mm] "Capacitor, Ceramic, Thru-Hole, Dipped Radial; Body 6.8 x 2.5 mm (WxT) Pin Spacing 7.62 mm (typ)"
  round 1.65 hole 1: 1(-3.81,0) 2(3.81,0)
  silkscreen extent -3.4,-1.25 3.4,1.25
ZZ311 [mm] "SOT-223/SC-73; 4 Leads; Body 6.7 x 7.3 mm, inc. leads (LxW max)"
  rect 1.1x1.55 smd: 1(-2.3,-3.375) 2(0,-3.375) 3(2.3,-3.375)
  rect 3.45x1.55 smd: 4(0,3.375)
  silkscreen extent -3.35,-4.82 3.35,1.85

## Part data
C1 C2 C3 C4 C6 C7 C8 C9 C11 C16 C19 C22 C24 C25 C28: library part C0805, "Ceramic Chip Capacitor - Standard", PackageDocument=Mar-2001, Code_IPC=2012[0805], Code_JEITA=0805, ComponentLink1Description="Manufacturer Link", ComponentLink1URL=http://www.kemet.com/, ComponentLink2Description=Datasheet, ComponentLink2URL=http://www.kemet.com/kemet/web/homepage/kechome.nsf/vapubfilesname/F3102TA.pdf/$file/F3102TA.pdf, DatasheetDocument=Mar-2001, LatestRevisionDate=19-Mar-2004, LatestRevisionNote="Silkscreen size reduced.", Note="Footprint corresponds to dimensions for bulk cassette packaging. This case size has tightened tolerances.", PackageReference=0805, Published=17-Jul-2002, Publisher="Altium Limited"
C5 C10 C12 C13 C14 C15 C17 C18 C20 C21 C26 C27: library part C0603, "Ceramic Chip Capacitor - Standard", PackageDocument=Mar-2001, Code_IPC="1608 [0603]", Code_JEITA=0603, ComponentLink1Description="Manufacturer Link", ComponentLink1URL=http://www.kemet.com/, ComponentLink2Description=Datasheet, ComponentLink2URL=http://www.kemet.com/kemet/web/homepage/kechome.nsf/vapubfilesname/F3102TA.pdf/$file/F3102TA.pdf, DatasheetDocument=Mar-2001, LatestRevisionDate=19-Mar-2004, LatestRevisionNote="Silkscreen size reduced.", Note="Footprint corresponds to dimensions for bulk cassette packaging. This case size has tightened tolerances.", PackageReference=0603, Published=17-Jul-2002, Publisher="Altium Limited"
C23: library part EKA00AA247F00, "Aluminum Electrolytic Capacitor, Radial Style with Long Leads: 47uF, 35V", ComponentLink1Description="Manufacturer Link", ComponentLink1URL=http://www.vishay.com/, ComponentLink2Description=Datasheet, ComponentLink2URL=http://www.vishay.com/docs/25014/eka.pdf, DatasheetDocument=20-Feb-2001, DrillSize="Nominal, Rounded To The Nearest 0.1mm", Note="Refer to Manufacturer's Data Sheets for other lead formations", PackageReference=CAPPR2-5X11, Published=19-Mar-2004, Publisher="Altium Limited"
C29 C30 C31 C32 C33 C34 C35 C36 C37 C38 C39 C40 C41 C42 C43 C44 C45 C46 C47 C48 C49 C50 C51 C52 C53 C54 C55 C56 C57 C58 C59 C60: library part VP52BA103, "Dipped Radial Multilayer Ceramic Capacitor COG (NPO): 10nF", PackageDocument=8-Feb-2002, ComponentLink1Description="Manufacturer Link", ComponentLink1URL=http://www.vishay.com/, DatasheetDocument=2-Jan-2002, Note="See Datasheet for other packages & tolerances", PackageReference=VP52-2.5, Published=17-Dec-2003, Publisher="Altium Limited"
D1 D3 D4 D5 D6 D7 D9 D10 D11 D13 D14 D15 D16 D18 D19 D20 D21 D22 D24 D25 D27 D28 D30 D31 D33 D34 D36 D37 D39 D40 D42 D43 D45 D46 D49 D50 D52 D53 D55 D56 D58 D59: library part BAS321, "General-purpose Diode", ComponentLink1Description="Manufacturer Link", ComponentLink1URL=http://www.semiconductors.philips.com/, ComponentLink2Description=Datasheet, ComponentLink2URL=http://www.semiconductors.philips.com/acrobat/datasheets/BAS321_2.pdf, DatasheetVersion=9-Feb-1999, LatestRevisionDate=19-Mar-2004, LatestRevisionNote="Silkscreen size reduced.", PackageDescription="SOD-323/SC-76; 2 Leads; Body 1.7 x 1.3 mm, (LxW)", PackageReference=SOD323, PackageVersion=May-1999, Published=17-Sep-2003, Publisher="Altium Limited"
D2 D12 D23 D29 D35 D41 D47 D48 D54: library part HSMZ-C190, "High Performance Chip LED, Red", LED_Colour=Red, PackageDocument=11-Mar-2002, ComponentLink1Description="Manufacturer Link", ComponentLink1URL=http://www.agilent.com/, ComponentLink2Description=Datasheet, ComponentLink2URL=http://cp.literature.agilent.com/litweb/pdf/5988-5891EN.pdf, DatasheetDocument=11-Mar-2002, LuminousIntensity="40mcd (Minimum).", PackageReference=1.6X0.8X0.8, PCB_Layout="Complies with manufacturer's recommendation.", Published=11-Dec-2002, Publisher="Altium Limited"
D8 D17 D26 D32 D38 D44 D51 D57: library part MMSZ5V1T1, "Zener Voltage Regulator, 500 mW, 2-Pin SOD-123, Tape and Reel", Manufacturer="On Semiconductor", Supplier Part Number 1=MMSZ5V1T1OSCT-ND, ComponentLink1Description="Manufacturer URL", ComponentLink1URL=http://www.onsemi.com/, ComponentLink2Description=Datasheet, ComponentLink2URL=http://www.onsemi.com/pub_link/Collateral/MMSZ2V4T1-D.PDF, ComponentLink3Description="Package Specification", ComponentLink3URL=http://www.onsemi.com/pub_link/Collateral/425-04.PDF, DatasheetVersion="Rev. 11", Mounting Technology="Surface Mount", PackageDescription="2-Pin SOD, Body 1.6 x 2.69 mm", PackageReference=SOD-123-2-425-04, PackageVersion="Rev. G, 10/2009", Packing="Tape and Reel", PartNumber=MMSZ5V1T1, P Max (W)=0.5, Supplier 1=Digi-Key, Supplier 2=Mouser, Supplier Part Number 2=863-MMSZ5V1T1
D60 D61 D62 D63 D64 D65 D66 D67 D68 D69 D70 D71 D72 D73 D74 D75: library part BTA08-600BW3G, "Triacs, Silicon Bidirectional Thyristor, 3-Pin TO-220, Pb-Free, Tube", Manufacturer="On Semiconductor", Supplier Part Number 1=BTA08-600BW3G-ND, ComponentLink1Description="Manufacturer URL", ComponentLink1URL=http://www.onsemi.com/, ComponentLink2Description=Datasheet, ComponentLink2URL=http://www.onsemi.com/pub_link/Collateral/BTA08-600BW3-D.PDF, ComponentLink3Description="Package Specification", ComponentLink3URL=http://www.onsemi.com/pub_link/Collateral/221A-07.PDF, DatasheetVersion="Rev. 1", IGT Max (mA)=50, IT(RMS) Max (A)=8, ITSM Max (A)=90, Mounting Technology="Through Hole", PackageDescription="3-Pin Flange Mount, Vertical Straight Lead, Body 9.97 x 4.445 mm, Pitch 2.54 mm", PackageReference=TO-220-3-221A-07, PackageVersion="Rev. O, 07/2008", Packing=Tube, PartNumber=BTA08-600BW3G, RoHS=Pb-Free, Supplier 1=Digi-Key, Supplier 2=Newark, Supplier 3=Mouser, Supplier Part Number 2=13P2072, Supplier Part Number 3=863-BTA08-600BW3G
FD1 FD2 FD4: library part Fiduchial, "Fiduchial mark"
L1: library part 74279202, "SMD EMI Suppression Ferrite Bead WE-CBF, Z = 120 Ohm", ComponentLink1Description="Manufacturer URL", ComponentLink1URL=http://www.we-online.com, ComponentLink2Description=Datasheet, ComponentLink2URL=http://www.we-online.de/katalog/media/pdf/74279202.pdf, DatasheetVersion=Dec-2005, Impedance="120 Ohm", PackageDescription="Chip Inductor, 2-Leads, Body 2.0 x 1.2 mm", PackageReference=SMD-0805, PackageVersion=2005
P1 P2 P3 P4 P5 P6 P7 P8 P9 P11 P14 P15: "2 pinski terminal blok"
P10: "Header, 3-Pin", LatestRevisionDate=17-Jul-2002, LatestRevisionNote="Re-released for DXP Platform.", Publisher="Altium Limited"
P12 P13: library part "TERMINAL BLOK 8 MANJI", "8 pin terminal cable connector"
Q1 Q2: library part BC817, "NPN General-purpose Transistor", ComponentLink1Description="Manufacturer Link", ComponentLink1URL=http://www.semiconductors.philips.com/, ComponentLink2Description=Datasheet, ComponentLink2URL=http://www.semiconductors.philips.com/acrobat/datasheets/BC817_BC817W_BC337_5.pdf, DatasheetVersion=Jun-1999, LatestRevisionDate=12-Dec-2006, LatestRevisionNote="IPC-7351 Footprint Added.", PackageDescription="3-Pin SOT-23 Package 0.95 mm Pitch, 2.3 mm Lead Span", PackageReference=SOT23, PackageVersion=May-1999, Published=17-Sep-2003, Publisher="Altium Limited"
R1 R2 R3 R4 R5 R6 R7 R9 R10 R11 R12 R14 R15 R16 R17 R18 R19 R20 R21 R22 R23 R25 R27 R28 R29 R30 R31 R32 R33 R34 R35 R37 R38 R39 R41 R42 R43 R45 R46 R47 R48 R49 R50 R52 R53 R54 R55 R56 R57 R59 R60 R61 R62 R63 R64 R67 R68 R69 R76 R77 R78 R80 R81 R82 R84 R85 R86 R87 R88 R89 R90 R91 R96 R97 R98 R99 R100 R101 R102 R103 R109 R110 R111 R112 R113 R114 R115 R116 R121 R122 R123 R124 R125 R126 R127 R128 R134 R135 R136 R137 R138 R139 R140 R141 R147 R148 R149 R150 R151 R152 R153 R154 R159 R160 R161 R162 R163 R164 R165 R166 R169 R170 R171 R172 R173 R174 R175 R176: library part ERA6Y, "Rectangular Thick Film Chip Resistor, 10 Ohm to 1M Ohm Range, 0.1% and 0.5% Tolerance, 0805 Size, 0.1 W", PackageDocument=Mar-2003, Code_IPC="2012 [0805]", ComponentLink1Description="Manufacturer Link", ComponentLink1URL=http://www.panasonic.com/industrial/components/resistive_products.htm, ComponentLink2Description=Datasheet, ComponentLink2URL=http://www.panasonic.com/industrial/components/pdf/AOA0000CE8.pdf, LatestRevisionDate=19-Mar-2004, LatestRevisionNote="Silkscreen size reduced.", Note="If flow soldering, adjust pad width of PCB Footprint to 0.7 - 0.8 times the width of the resistor.", PackageReference=ERA-0805, Published=17-Dec-2003, Publisher="Altium Limited"
R8 R13 R24 R26 R36 R40 R44 R51 R58 R65 R66 R70 R71 R72 R73 R74 R75 R79: library part ERAV, "Metal Film Thermosensitive Chip Resistor, 0.56 Ohm to 10k Ohm Range, 5% Tolerance, 0603 Size, 0.063 W", PackageDocument=Mar-2003, Code_IPC="1608 [0603]", ComponentLink1Description="Manufacturer Link", ComponentLink1URL=http://www.panasonic.com/industrial/components/resistive_products.htm, ComponentLink2Description=Datasheet, ComponentLink2URL=http://www.panasonic.com/industrial/components/pdf/AOF0000CE1.pdf, LatestRevisionDate=19-Mar-2004, LatestRevisionNote="Silkscreen size reduced.", Note="If flow soldering, adjust pad width of PCB Footprint to 0.7 - 0.8 times the width of the resistor.", PackageReference=ERA-0603, Published=17-Dec-2003, Publisher="Altium Limited"
R83 R94 R95 R106 R107 R108 R119 R120 R131 R132 R133 R144 R145 R146 R157 R158: library part ERG12, "Metal Oxide Film Resistor, 0.1 Ohm to 47k Ohm Range, 2% and 5% Tolerance, 0.5 W", ComponentLink1Description="Manufacturer Link", ComponentLink1URL=http://www.panasonic.com/industrial/components/resistive_products.htm, ComponentLink2Description=Datasheet, ComponentLink2URL=http://www.panasonic.com/industrial/components/pdf/AOA0000CE18.pdf, PackageReference=R6.35x2.3, Published=17-Dec-2003, Publisher="Altium Limited"
R92 R93 R104 R105 R117 R118 R129 R130 R142 R143 R155 R156 R167 R168 R177 R178: library part ERA3Y, "Rectangular Thick Film Chip Resistor, 10 Ohm to 330k Ohm Range, 0.1% and 0.5% Tolerance, 0603 Size, 0.063 W", PackageDocument=Mar-2003, Code_IPC="1608 [0603]", ComponentLink1Description="Manufacturer Link", ComponentLink1URL=http://www.panasonic.com/industrial/components/resistive_products.htm, ComponentLink2Description=Datasheet, ComponentLink2URL=http://www.panasonic.com/industrial/components/pdf/AOA0000CE8.pdf, LatestRevisionDate=19-Mar-2004, LatestRevisionNote="Silkscreen size reduced.", Note="If flow soldering, adjust pad width of PCB Footprint to 0.7 - 0.8 times the width of the resistor.", PackageReference=ERA-0603, Published=17-Dec-2003, Publisher="Altium Limited"
U1 U2 U3 U4 U5 U7 U9 U10 U11 U12: "4-Pin Phototransistor Optocoupler", DatasheetVersion=Nov-2003, LatestRevisionDate=04-Mar-2005, LatestRevisionNote="Sch pins 3 & 4 Swapped.", PackageReference=DIP-4, Published=24-Mar-1999, Publisher="Altium Limited"
U6: "Differential Bus Transceiver", Code_IPC=SOIC127P600-8, ComponentLink1Description="Manufacturer Link", ComponentLink1URL=http://www.ti.com/, ComponentLink2Description=Datasheet, ComponentLink2URL=http://www-s.ti.com/sc/ds/sn75176b.pdf, DatasheetVersion=Sep-1989, LatestRevisionDate=13-Apr-2006, LatestRevisionNote="IPC-7351 Footprint Added.", Note="Receiver Hysteresis of 50mV Typical", PackageDescription="8-Pin Small Outline Integrated Circuit 1.27 mm Pitch", PackageReference=D008, PackageVersion=Jan-1998, Published=15-May-2002, Publisher="Altium Limited"
U8: "ARM Cortex-M3 32-bit MCU, 64 KB Flash, 20 KB Internal RAM, 37 I/Os, 48-pin LQFP, -40 to 85 degC, Tray", I/Os (High Current)=37, Operating Frequency(F) (Processor speed) (MHz)=72, Supplier Part Number 1=497-6063-ND, Supply Voltage(Vcc) min (V)=2, A/D Converter="2x12-bit (10 Channel)", ComponentLink1Description="Manufacturer URL", ComponentLink1URL=http://www.st.com/web/en/home.html, ComponentLink2Description=Datasheet, ComponentLink2URL=http://www.st.com/st-web-ui/static/active/en/resource/technical/document/datasheet/CD00161566.pdf, ComponentLink3Description="Package Specification", ComponentLink3URL=http://www.st.com/st-web-ui/static/active/en/resource/technical/document/datasheet/DM00058181.pdf, Core="ARM Cortex-M3", DatasheetVersion="Rev. 16", FLASH Size (Prog) (kB)=64, Internal RAM Size (kB)=20, Mounting Technology="Surface Mount", PackageDescription="48-Pin Low Profile Quad Flat Package, 7 x 7 mm Body, 0.5 mm Pitch", PackageReference=LQFP48, PackageVersion="Rev. 6, 06/2013", Packing=Tray, PartNumber=STM32F103C8T6, Supplier 1=Digi-Key, Supplier 2=Farnell, Supplier 3=Newark, Supplier 4=Newark, Supplier 5=Mouser, Supplier Part Number 2=1447637, Supplier Part Number 3=59M2182, Supplier Part Number 4=57P1222, Supplier Part Number 5=511-STM32F103C8T6
U13: "Positive Voltage Regulator", ComponentLink1Description="Manufacturer Link", ComponentLink1URL=http://www.st.com/, DatasheetVersion=Dec-1998, LatestRevisionDate=17-Jul-2002, LatestRevisionNote="Re-released for DXP Platform.", Note="Tab is connected to pin 3 (GND).", PackageDescription="TO, Thru-Hole, Vertical, Heatsink Mounted; 3 In-Line Leads; Pitch 2.54 mm; Pin sequence 1, 3, 2", PackageReference=TO220ABN, PackageVersion=Jun-1998, Published=24-Aug-2001, Publisher="Altium Limited"
U14: "800mA and 1A Low Dropout Positive Regulator 2.85V, 3.3V, 5V, and Adjustable", ComponentLink1Description="Manufacturer Link", ComponentLink1URL=http://www.ti.com/, ComponentLink2Description=Datasheet, ComponentLink2URL=http://www-s.ti.com/sc/ds/REG1117.pdf, DatasheetVersion=Sep-1997, LatestRevisionDate=17-Jul-2002, LatestRevisionNote="Re-released for DXP Platform.", PackageDescription="SOT-223/SC-73; 4 Leads; Body 6.7 x 7.3 mm, inc. leads (LxW max)", PackageReference=ZZ311, PackageVersion=revC, Published=8-Jun-2000, Publisher="Altium Limited"
U15 U16 U17 U18 U19 U20 U21 U22 U23 U24 U25 U26 U27 U28 U29 U30: library part MOC3081, "Zero-Cross Optoisolator Triac Driver"

## Via types
v1: diameter 30, hole 10, Top Layer to Bottom Layer, 45 vias

## Nets (pads, with @x,y where several pads share a name; then routed paths per layer and width w, separated by ;. In a path a pad name is that pad's centre, name@x,y a point inside that pad or via, vN(x,y) a via of type N, cw(c..) or ccw(c..) an arc to the next point about the centre after c; other vN are vias at no path point)
+3V3: C12.2 C13.2 C14.2 C15.2 C16.2 C26.2 C28.2 L1.1 U1.4 U2.4 U3.4 U4.4 U5.4 U7.4 U8.1 U8.24 U8.36 U8.48 U9.4 U10.4 U11.4 U12.4 U14.2 U14.4 | length 9536.4
  Top Layer w10: C16.2@5697.4,2135 5698.46,2133.94 C12.2@5698.46,2065 5735,2065 5751.73,2048.27 U8.1@5855.55,2048.27 ; C15.2@5835,2191.54 5883.46,2191.54 5906.73,2168.27 U8.48@5906.73,2099.45 ; U8.24@6123.27,1780.55 6144.45,1780.55 6193.46,1731.54 C13.2@6193.46,1695 ; U8.36@6174.45,2048.27 6175,2048.82 6175,2090 6203.46,2118.46 C14.2@6270,2118.46
  Top Layer w30: U3.4@4720,1755 4720,1715 4775,1660 4995,1660 5083.15,1571.85 5083.15,1430 ; U12.4@5083.15,1355 5083.15,1430 ; U2.4@5388.43,2590 5388.43,2633.43 5410,2655 5900,2655 ; v1(5462.5,2195) 5690,2195 v1(5700,2185) ; L1.1@5603.74,1715 5603.74,1355.59 U11.4@5598.15,1350 5518.15,1430 5083.15,1430 ; C12.2@5698.46,2065 5700,2066.54 v1(5700,2185) ; C15.2@5830,2186.54 5828.46,2185 v1(5700,2185) ; U4.4@5898.43,2590 5898.43,2653.43 5900,2655 ; U10.4@6113.15,1350 6113.15,1420 ; C13.2@6193.46,1695 6193.46,1548.46 6113.15,1468.15 6113.15,1420 ; C14.2@6270,2118.46 v1(6270,2185) ; U5.4@6398.43,2590 6398.43,2651.57 6395,2655 ; U9.4@6626.57,1355 6561.57,1420 6113.15,1420 ; 7345,2445 7000,2445 6921.85,2523.15 U7.4@6921.85,2590 6921.85,2618.15 6885,2655 6395,2655 ; 5900,2655 6395,2655
  Bottom Layer w30: U3.4@4720,1755 4670,1705 4450,1705 4410,1745 4410,1800 4685,2075 U1.4@4685,2210 4685,2225 4750,2290 5225,2290 ; U2.4@5388.43,2590 5388.43,2626.57 5360,2655 5245,2655 5225,2635 5225,2290 ; v1(5462.5,2195) 5320,2195 5225,2290 ; U11.4@5598.15,1350 5598.15,1311.85 5635,1275 6038.15,1275 U10.4@6113.15,1350 ; v1(5700,2185) v1(6270,2185)
+5V: C5.1 C20.2 C21.2 C22.2 C23.1 C25.2 U6.8 U13.2 U14.3 | length 3711.7
  Top Layer w20: U6.8@7488.43,472.48 v1(7630,472.5)
  Top Layer w30: C23.1@7180,2540 7272.65,2632.65 C25.2@7272.65,2740 ; C25.2@7268.72,2740 C25.2@7272.65,2740 ; U14.3@7364.45,2741.3 7363.15,2740 C25.2@7272.65,2740 ; C20.2@7606.89,3320 7606.89,3098.54 U13.2@7525,3016.65 7525,2945 7480,2900 7315,2900 7272.65,2857.65 C21.2@7272.65,2820 C25.2@7272.65,2740
  Bottom Layer w30: C23.1@7180,2540 7180,700 7270,610 7550,610 7630,530 v1(7630,472.5) v1@7630,470
BOOT0: R75.1 U8.44 | length 142.3
  Top Layer w10: R75.1@5985,2241.54 5985.47,2241.06 U8.44@5985.47,2099.45
DIMM0: R92.1 U8.18 | length 6019
  Top Layer w10: R92.1@283.46,2115 555,2115 695,1975 5215,1975 v1@5280,1910 ; v1(6005,1875) 6005.16,1874.84 U8.18@6005.16,1780.55
  Bottom Layer w10: v1@5280,1910 5415,1910 5575,1750 5880,1750 v1(6005,1875)
  other v1: 5280,1912.5
DIMM1: R104.1 U8.19 | length 5566.8
  Top Layer w10: R104.1@833.46,2115 1165,2115 1278,2002 5238,2002 v1(5280,1960) ; U8.19@6024.84,1780.55 6024.84,1715.16 v1(6025,1715)
  Bottom Layer w10: v1(5280,1960) 5260,1960 5240,1940 5240,1845 5260,1825 5444.54,1825 5564.54,1705 6015,1705 v1(6025,1715)
DIMM2: R117.1 U8.20 | length 5066.8
  Top Layer w10: R117.1@1388.46,2115 1695,2115 1790,2020 5290,2020 5320,1990 5320,1895 v1@5285,1860 ; U8.20@6044.53,1780.55 6044.53,1844.53 v1(6045,1845)
  Bottom Layer w10: v1(5280,1865) 5430,1865 5572,1723 5923,1723 v1(6045,1845)
DIMM3: R129.1 U8.39 | length 4618
  Top Layer w10: R129.1@1938.46,2115 2165,2115 2385,2335 5356.31,2335 5478.31,2457 6019.82,2457 6097,2379.82 6097,2170.18 6083.9,2157.07 U8.39@6083.9,2099.45
DIMM4: R142.1 U8.40 | length 4027
  Top Layer w10: R142.1@2493.46,2115 2740,2115 2940,2315 5365,2315 5489,2439 6012.37,2439 6079,2372.37 6079,2177.63 6063.43,2162.07 6063.43,2100.23 U8.40@6064.21,2099.45
DIMM5: R155.1 U8.41 | length 3440.4
  Top Layer w10: R155.1@3043.46,2115 3290,2115 3470,2295 5370.46,2295 5496.46,2421 6004.91,2421 6061,2364.91 6061,2185.09 6043.75,2167.84 6043.75,2100.23 U8.41@6044.53,2099.45
DIMM6: R167.1 U8.42 | length 2848.9
  Top Layer w10: R167.1@3598.46,2115 3845,2115 4005,2275 5375.91,2275 5503.91,2403 5997.46,2403 6043,2357.46 6043,2192.54 6024.06,2173.61 6024.06,2100.23 U8.42@6024.84,2099.45
DIMM7: R177.1 U8.43 | length 2256.6
  Top Layer w10: R177.1@4153.46,2115 4355,2115 4495,2255 5381.37,2255 5511.37,2385 5990,2385 6025,2350 6025,2200 6005.16,2180.16 U8.43@6005.16,2099.45
DIMM8: R93.1 U8.45 | length 2092.4
  Top Layer w10: R93.1@4443.46,1755 v1(4510,1755) ; v1@4785,2190 4830,2235 5390,2235 5520,2365 5890,2365 5945,2310 5945,2215.91 5965.79,2195.12 U8.45@5965.79,2099.45
  Bottom Layer w10: v1(4510,1755) 4785,2030 v1(4785,2192.5)
DIMM9: R105.1 U8.46 | length 2687.9
  Top Layer w10: R105.1@3888.46,1755 3965,1755 4035,1685 4495,1685 v1(4565,1755) ; v1@4855,2190 4882,2217 5397.46,2217 5527.46,2347 5882.54,2347 5927,2302.54 5927,2208.46 5946.1,2189.35 U8.46@5946.1,2099.45
  Bottom Layer w10: v1(4565,1755) 4615,1755 4855,1995 v1(4855,2192.5)
DIMM10: R118.1 U8.21 | length 2853.1
  Top Layer w10: R118.1@3338.46,1755 v1(3397.5,1755) ; v1(6025,1665) 6064.21,1704.21 U8.21@6064.21,1780.55
  Bottom Layer w10: v1@3400,1755 3480,1675 6015,1675 v1(6025,1665)
DIMM11: R130.1 U8.22 | length 3490.5
  Top Layer w10: R130.1@2783.46,1755 2827.5,1755 v1(2830,1757.5) ; v1(6025,1615) 6083.9,1673.9 U8.22@6083.9,1780.55
  Bottom Layer w10: v1@2830,1755 2930,1655 5955,1655 5995,1615 v1(6025,1615)
DIMM12: R143.1 U8.25 | length 4722.2
  Top Layer w10: R143.1@2233.46,1755 2233.46,1833.46 2290,1890 5128.63,1890 5225,1793.63 v1(5225,1617.5) ; U8.25@6174.45,1831.73 6228.27,1831.73 v1(6280,1780)
  Bottom Layer w10: v1@5225,1615 5314,1526 6067.37,1526 6154,1612.63 6154,1764 6170,1780 v1(6280,1780)
DIMM13: R156.1 U8.26 | length 5294.6
  Top Layer w10: R156.1@1678.46,1755 1678.46,1848.46 1744,1914 5130.09,1914 5285,1759.09 v1(5285,1617.5) ; U8.26@6174.45,1851.42 6175.23,1850.64 6254.36,1850.64 v1(6280,1825) ; v1@6270.46,1825 v1@6275,1825
  Bottom Layer w10: v1@5285,1615 5356,1544 6059.91,1544 6136,1620.09 6136,1790.54 6170.46,1825 v1(6280,1825)
DIMM14: R168.1 U8.27 | length 5821.3
  Top Layer w10: R168.1@1123.46,1755 1123.46,1828.46 1227,1932 5137.54,1932 5350,1719.54 v1(5350,1617.5) ; U8.27@6174.45,1871.1 v1(6280,1871.1)
  Bottom Layer w10: v1@5350,1615 5350,1610 5398,1562 6052.46,1562 6118,1627.54 6118,1798 6191.1,1871.1 v1(6280,1871.1)
DIMM15: R178.1 U8.28 | length 6192.8
  Top Layer w10: R178.1@573.46,1755 573.46,1838.46 685,1950 5145,1950 5440,1655 v1(5440,1612.5) ; v1(6100,1890) 6100.79,1890.79 U8.28@6174.45,1890.79
  Bottom Layer w10: v1@5442.5,1615 5442.5,1602.5 5465,1580 6045,1580 6100,1635 v1(6100,1890)
DIMMER0: D60.2 P12.1 R83.1 R87.2 | length 1996.9
  Top Layer w20: R87.2@237.6,2745 237.6,2782.6 327.83,2872.83 D60.2@327.83,3020
  Top Layer w59.06: D60.2@327.83,3020 327.83,3072.83 460,3205 R83.1@526.16,3205 565,3243.84 565,3460 810,3705 P12.1@1571.02,3705
DIMMER1: D62.2 P12.2 R94.1 R99.2 | length 1601
  Top Layer w20: R99.2@782.6,2740 782.6,2777.6 880.62,2875.62 D62.2@880.62,3020
  Top Layer w59.06: D62.2@880.62,3020 880.62,3065.62 1020,3205 R94.1@1078.94,3205 1115,3241.06 1115,3345 1325,3555 1655,3555 1767.87,3667.87 P12.2@1767.87,3705
DIMMER2: D64.2 P12.3 R95.1 R112.2 | length 1257.1
  Top Layer w20: R112.2@1327.6,2745 1327.6,2777.6 1433.4,2883.4 D64.2@1433.4,3020
  Top Layer w59.06: D64.2@1433.4,3020 1433.4,3063.4 1575,3205 R95.1@1631.72,3205 1665,3238.28 1665,3320 1964.72,3619.72 P12.3@1964.72,3705
DIMMER3: D66.2 P12.4 R106.1 R124.2 | length 1160
  Top Layer w20: R124.2@1882.6,2745 1882.6,2777.6 1986.18,2881.18 D66.2@1986.18,3020
  Top Layer w59.06: D66.2@1986.18,3020 1986.18,3061.18 2130,3205 R106.1@2184.5,3205 2225,3245.5 2225,3550 2161.57,3613.43 P12.4@2161.57,3705
DIMMER4: D68.2 P12.5 R107.1 R137.2 | length 1414.2
  Top Layer w20: R137.2@2437.6,2745 2437.6,2792.6 2538.96,2893.96 D68.2@2538.96,3020
  Top Layer w59.06: P12.5@2358.43,3705 2358.43,3606.57 2520,3445 2700,3445 2775,3370 2775,3242.71 R107.1@2737.29,3205 2675,3205 2538.96,3068.96 D68.2@2538.96,3020
DIMMER5: D70.2 P12.6 R108.1 R150.2 | length 1774.5
  Top Layer w20: R150.2@2979.9,2745 2979.9,2779.9 3091.74,2891.74 D70.2@3091.74,3020
  Top Layer w59.06: P12.6@2555.28,3705 2555.28,3619.72 2625,3550 2755,3550 2855,3450 3265,3450 3330,3385 3330,3244.93 R108.1@3290.07,3205 3235,3205 3091.74,3061.74 D70.2@3091.74,3020
DIMMER6: D72.2 P12.7 R119.1 R162.2 | length 2112
  Top Layer w20: R162.2@3532.6,2740 3532.6,2782.6 3644.52,2894.52 D72.2@3644.52,3020
  Top Layer w59.06: P12.7@2752.13,3705 2887.13,3570 3730,3570 3890,3410 3890,3252.15 R119.1@3842.85,3205 3785,3205 3644.52,3064.52 D72.2@3644.52,3020
DIMMER7: D74.2 P12.8 R120.1 R172.2 | length 2822.7
  Top Layer w20: R172.2@4094.9,2740 4094.9,2779.9 4197.3,2882.3 D74.2@4197.3,3020
  Top Layer w59.06: P12.8@2948.98,3705 3780,3705 3920,3845 4355,3845 4460,3740 4460,3269.37 R120.1@4395.63,3205 4295,3205 4197.3,3107.3 D74.2@4197.3,3020
DIMMER8: D61.2 P13.1 R91.2 R131.1 | length 2013.1
  Top Layer w20: D61.2@4172.7,945 4172.7,1057.7 4292.4,1177.4 R91.2@4292.4,1225
  Top Layer w59.06: P13.1@2948.98,235 3665,235 3930,500 3930,655 3974.37,699.37 R131.1@3974.37,760 4055,760 4172.7,877.7 D61.2@4172.7,945
DIMMER9: D63.2 P13.2 R103.2 R132.1 | length 1600.1
  Top Layer w20: D63.2@3619.92,945 3619.92,1059.92 3732.4,1172.4 R103.2@3732.4,1225
  Top Layer w59.06: P13.2@2752.13,235 2752.13,297.13 2840,385 3110,385 3421.59,696.59 R132.1@3421.59,760 3500,760 3619.92,879.92 D63.2@3619.92,945
DIMMER10: D65.2 P13.3 R116.2 R133.1 | length 1311.1
  Top Layer w20: D65.2@3067.13,945 3067.13,1057.13 3182.4,1172.4 R116.2@3182.4,1230
  Top Layer w59.06: P13.3@2555.28,235 2555.28,295.28 2840,580 2840,731.19 R133.1@2868.81,760 2965,760 3067.13,862.13 D65.2@3067.13,945
DIMMER11: D67.2 P13.4 R128.2 R144.1 | length 1226.5
  Top Layer w20: D67.2@2514.35,945 2514.35,1064.35 2626.77,1176.77 R128.2@2626.77,1225
  Top Layer w59.06: P13.4@2358.43,235 2358.43,471.57 2270,560 2270,650 2316.03,696.03 R144.1@2316.03,760 2405,760 2514.35,869.35 D67.2@2514.35,945
DIMMER12: D69.2 P13.5 R141.2 R145.1 | length 1484
  Top Layer w20: D69.2@1961.57,945 1961.57,1061.57 2076.77,1176.77 R141.2@2076.77,1225
  Top Layer w59.06: D69.2@1961.57,945 1961.57,866.57 1855,760 R145.1@1763.25,760 1763.25,703.25 1715,655 1715,595 1775,535 1837.66,535 1932.66,440 2050,440 2161.57,328.43 P13.5@2161.57,235
DIMMER13: D71.2 P13.6 R146.1 R154.2 | length 1815.4
  Top Layer w20: D71.2@1408.79,945 1408.79,1068.79 1521.77,1181.77 R154.2@1521.77,1225
  Top Layer w59.06: D71.2@1408.79,945 1408.79,868.79 1300,760 R146.1@1210.46,760 1210.46,705.46 1160,655 1160,545 1225,480 1670,480 1715,435 1764.72,435 P13.6@1964.72,235
DIMMER14: D73.2 P13.7 R157.1 R166.2 | length 2261.7
  Top Layer w20: D73.2@856.01,945 856.01,1066.01 971.77,1181.77 R166.2@971.77,1225
  Top Layer w59.06: D73.2@856.01,945 856.01,856.01 760,760 R157.1@657.68,760 657.68,702.68 595,640 595,435 675,355 1647.87,355 P13.7@1767.87,235
DIMMER15: D75.2 P13.8 R158.1 R176.2 | length 2609.8
  Top Layer w20: D75.2@303.23,945 303.23,1073.23 417.4,1187.4 R176.2@417.4,1225
  Top Layer w59.06: D75.2@303.23,945 303.23,878.23 185,760 R158.1@104.9,760 65,720.1 65,370 200,235 P13.8@1571.02,235
DIN0: R13.1 U2.3 U8.10 | length 1426
  Top Layer w10: v1(5755,1785) 5755,1825 5801.1,1871.1 U8.10@5855.55,1871.1
  Top Layer w20: R13.1@5201.89,2590 U2.3@5288.43,2590
  Bottom Layer w10: U2.3@5288.43,2590 5288.43,2541.57 5313.2,2516.8 5453.2,2516.8 5500,2470 5500,1870 5585,1785 v1(5755,1785)
DIN1: R26.1 U4.3 U8.11 | length 1442.2
  Top Layer w10: v1(5805,1785) 5805,1840 5816.42,1851.42 U8.11@5855.55,1851.42
  Top Layer w20: R26.1@5711.89,2590 U4.3@5798.43,2590
  Bottom Layer w10: U4.3@5798.43,2590 5640,2590 5520,2470 5520,1885 5590,1815 5785,1815 5805,1795 v1(5805,1785)
DIN2: R36.1 U5.3 U8.12 | length 1881.9
  Top Layer w10: v1(5855,1785) 5855.55,1785.55 U8.12@5855.55,1831.73
  Top Layer w20: R36.1@6196.89,2590 U5.3@6298.43,2590
  Bottom Layer w10: v1(5855,1785) 5847.43,1785 5799.43,1833 5597.46,1833 5538,1892.46 5538,2443 5630,2535 6243.43,2535 U5.3@6298.43,2590
DIN3: R44.1 U7.3 U8.13 | length 2428.7
  Top Layer w10: U8.13@5906.73,1780.55 5906.73,1831.73 v1(5930,1855)